# Altium PCB PCB1.PcbDoc
Units mil, origin at the board's own origin, x right, y up, seen from the top; angles counter-clockwise.
Board outline 3930 x 2900 mil, 2 copper layers (Top Layer, Bottom Layer); 19 components, 44 nets, 199 pads, 69 vias.
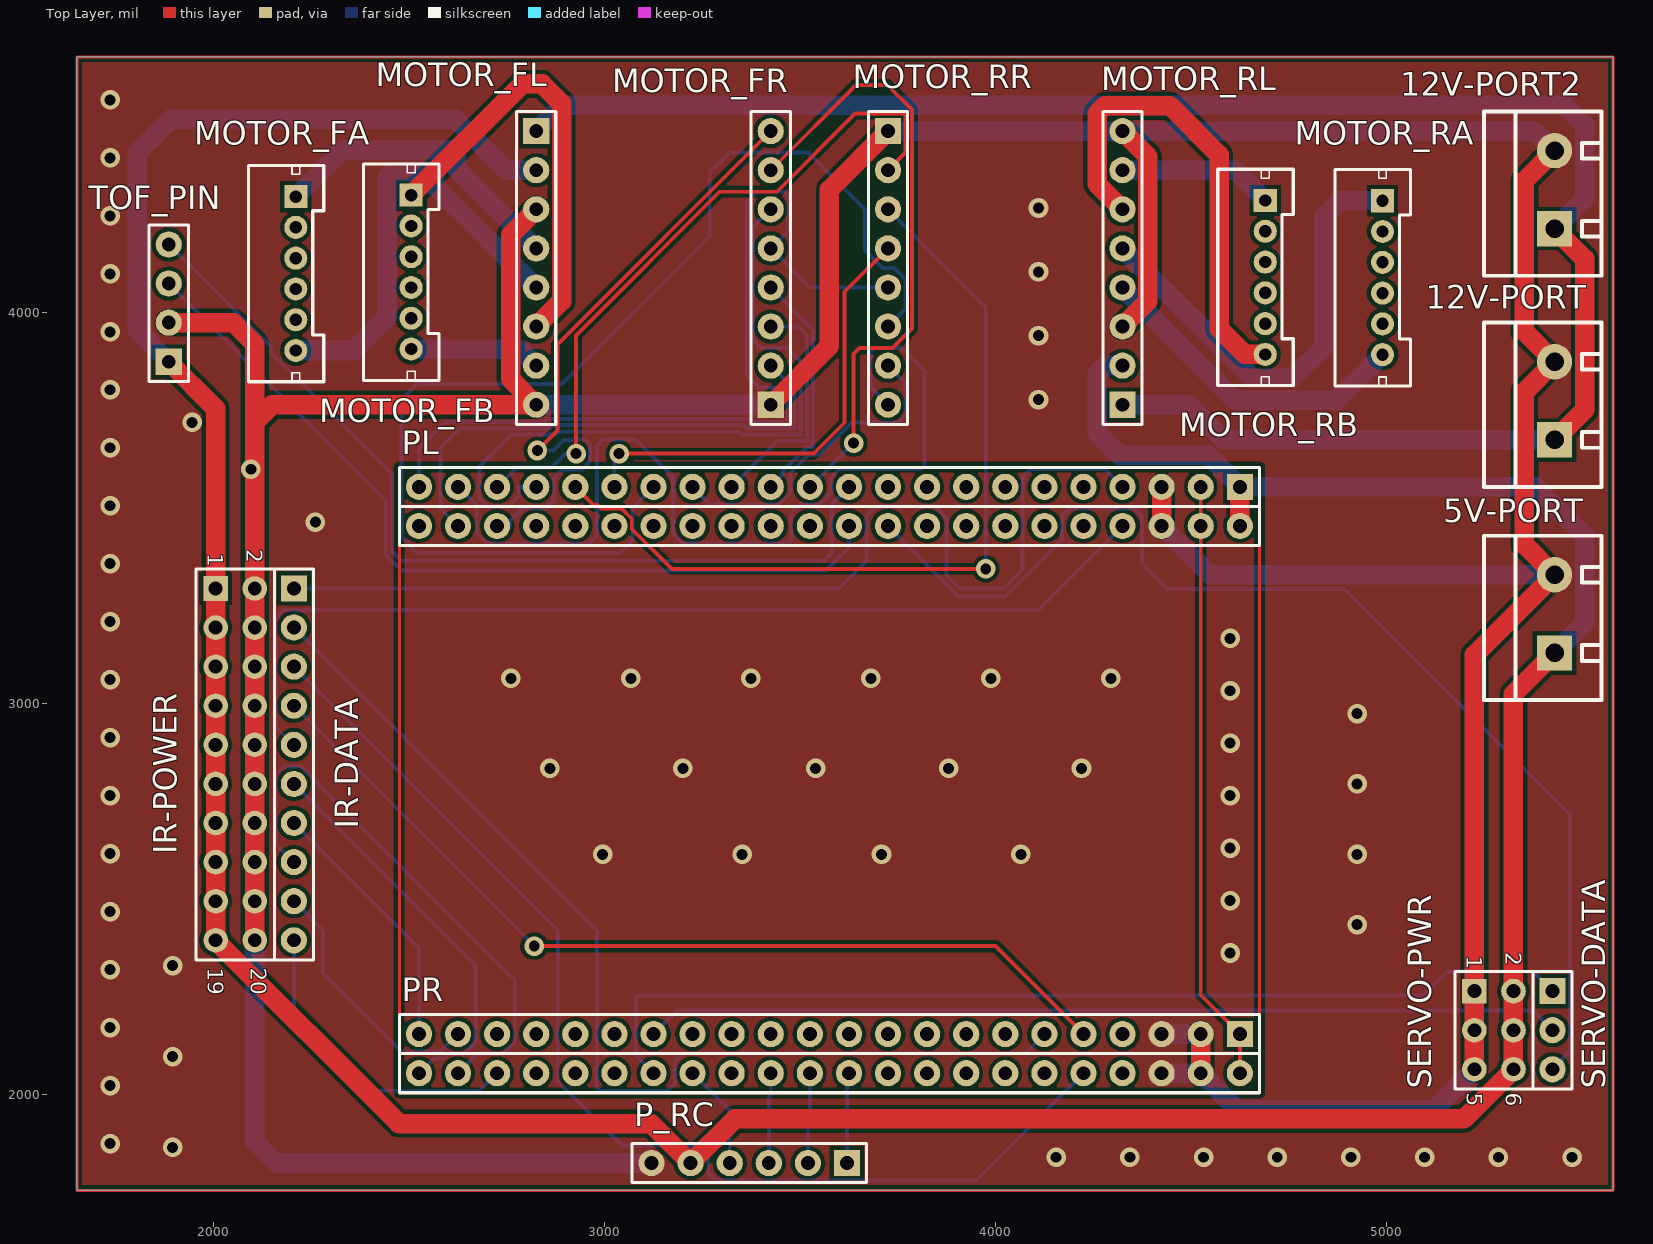
[diagram p0: Top Layer view]
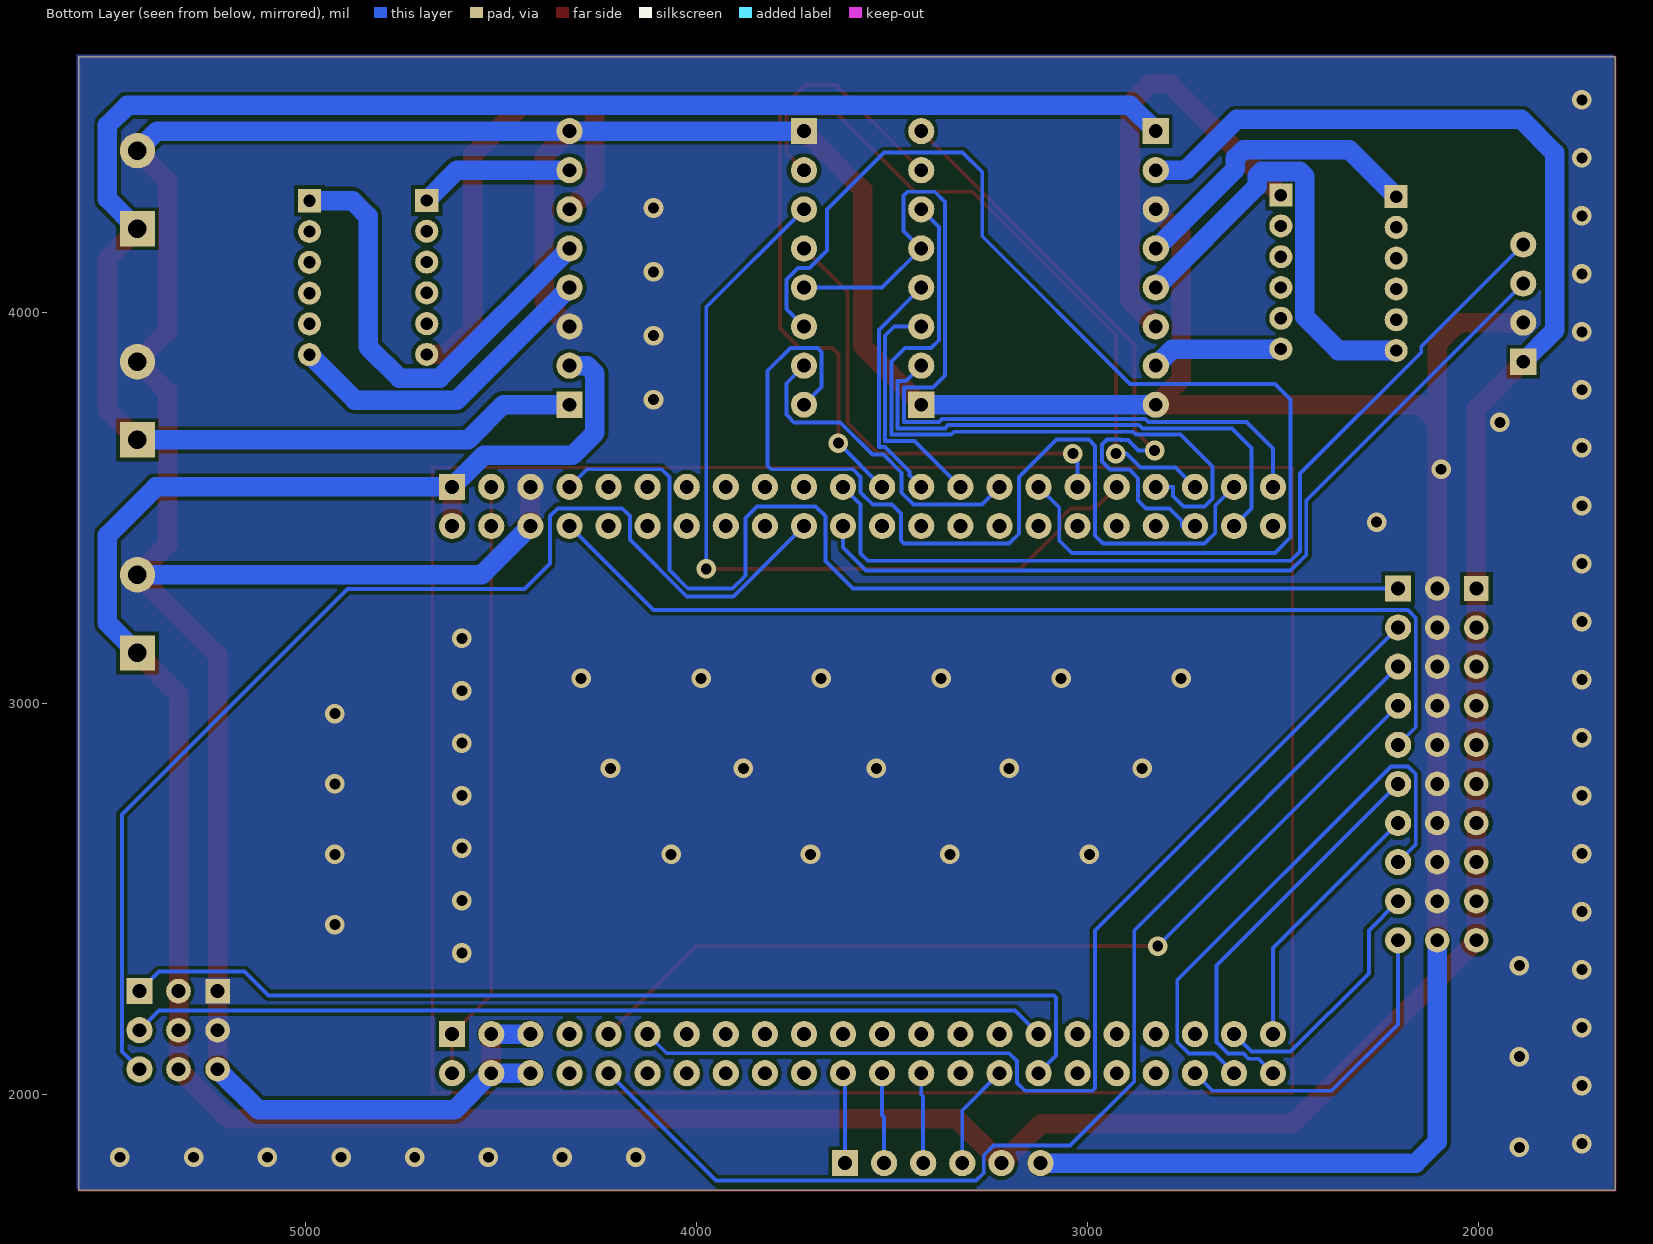
[diagram p1: Bottom Layer view, seen from below]

## Layer stack, top to bottom
Top Solder: solder mask 0.4, Solder Resist, Dk 3.5
Top Layer: signal copper 1.4
Dielectric 1: dielectric 12.6, FR-4, Dk 4.8
Bottom Layer: signal copper 1.4
Bottom Solder: solder mask 0.4, Solder Resist, Dk 3.5

## Board outline
1650,1755 1650,4655 5580,4655 5580,1755

## Design rules (kind name [scope] priority, off if disabled: settings)
Clearance [All] p1: gap=6 ignorepadtopadclearanceinfootprint=FALSE except(10: Arc-Poly Track-Poly SMDPad-Poly THPad-Poly Via-Poly Fill-Poly Poly-Poly)
ComponentClearance [All] p1: gap=0 collisioncheckmode=3 verticalgap=10 showdistances=FALSE
PolygonConnect [All] p1: thpad.connectstyle=Direct thpad.reliefconductorwidth=10 thpad.reliefentries=4 thpad.polygonreliefangle="90 Angle" thpad.airgapwidth=10 smdpad.connectstyle=Relief smdpad.reliefconductorwidth=10 smdpad.reliefentries=4 smdpad.polygonreliefangle="90 Angle" smdpad.airgapwidth=10 via.connectstyle=Direct via.reliefconductorwidth=10 via.reliefentries=4 via.polygonreliefangle="90 Angle" via.airgapwidth=10
RoutingVias [All] p1: holewidth=28 width=50 viastyle="Through Hole" minholewidth=28 minwidth=50 maxholewidth=28 maxwidth=50
SilkToSilkClearance [All] p1: silktosilkclearance=1
SilkToSolderMaskClearance [IsPad] p1: minsilkscreentomaskgap=1 clearancetoexposedcopper=TRUE
SolderMaskExpansion [All] p1: expansion=4
Width Width_1 [(InNet('+5') OR InNet('+12') OR InNet('FAO1') OR InNet('FAO2') OR InNet('FBO1') OR InNet('FBO2') OR InNet('GND') OR InNet('RAO1') OR InNet('RAO2') OR InNet('RBO1') OR InNet('RBO2'))] p1: maxlimit=110 minlimit=40 preferedwidth=50
Width [All] p2: maxlimit=10 minlimit=7 preferedwidth=10
27 further rules are at their usual default settings.

## Components (designator, comment, footprint, x,y, rotation, side; value= is the part's Value field where it differs from the comment)
5V-PORT "HDR-1X2" KF301-5.0-2P 5430,3330 r90 top
12V-PORT "HDR-1X2" KF301-5.0-2P 5430,3875 r90 top
12V-PORT2 "HDR-1X2" KF301-5.0-2P 5430,4415 r90 top
IR-DATA "HDR-1X10" HDR2.54-LI-10P 2205,2845 r270 top
IR-POWER "Header 2X10" HDR2.54-LI-2x10P 2055,2845 r270 top
MOTOR_FA "HDR-1X6" PH2.0-LI-6P 2210,4100.63 r270 top
MOTOR_FB "HDR-1X6" PH2.0-LI-6P 2505,4104.37 r270 top
MOTOR_FL "MHDR1X8" HDR2.54-M-LI-8P 2825,4115 r270 top
MOTOR_FR "MHDR1X8" HDR2.54-M-LI-8P 3425,4115 r90 top
MOTOR_RA "HDR-1X6" PH2.0-LI-6P 4990,4090 r270 top
MOTOR_RB "HDR-1X6" PH2.0-LI-6P 4690,4090.63 r270 top
MOTOR_RL "MHDR1X8" HDR2.54-M-LI-8P 4325,4115 r90 top
MOTOR_RR "MHDR1X8" HDR2.54-M-LI-8P 3725,4115 r270 top
P_RC "MHDR1X6" HDR2.54-M-LI-6P 3370,1825 r180 top
PL "Header 22X2" P_M_2x22P 4625,3455 r180 top
PR "Header 22X2" P_M_2x22P 4625,2055 r180 top
SERVO-DATA "HDR-1X3" HDR2.54-LI-3P 5425,2165 r270 top
SERVO-PWR "Header3X2" HDR2.54-LI-2x3P 5275,2165 r270 top
TOF_PIN "HDR-1X4" HDR2.54-LI-4P 1885,4025 r90 top

## Footprints (in the part's own frame and the unit in brackets; to place one, negate y for a bottom-side part, rotate by r counter-clockwise, add the part's x,y. Pads: shape width x height; smd on the part's side, far side on the other; paste and mask are expansions set on the pad)
HDR2.54-LI-2x3P [mm] "封装库来自淘宝卖家 ID：黄晶宝石"
  rect 1.6x1.6 hole 0.9: 1(-2.54,-1.27)
  round 1.6 hole 0.9: 2(-2.54,1.27) 3(0,-1.27) 4(0,1.27) 5(2.54,-1.27) 6(2.54,1.27)
  silkscreen extent -3.81,-2.54 3.81,2.54, body extent -3.81,-2.54 3.81,2.54, height 8.5
HDR2.54-LI-2x10P [mm] "双排排针，10x2脚 淘宝ID:黄晶宝石   店铺网址:https://shop463601444.taobao.com"
  rect 1.6x1.6 hole 0.9: 1(-11.43,-1.27)
  round 1.6 hole 0.9: 2(-11.43,1.27) 3(-8.89,-1.27) 4(-8.89,1.27) 5(-6.35,-1.27) 6(-6.35,1.27) 7(-3.81,-1.27) 8(-3.81,1.27) 9(-1.27,-1.27) 10(-1.27,1.27) 11(1.27,-1.27) 12(1.27,1.27) 13(3.81,-1.27) 14(3.81,1.27) 15(6.35,-1.27) 16(6.35,1.27) 17(8.89,-1.27) 18(8.89,1.27) 19(11.43,-1.27) 20(11.43,1.27)
  silkscreen extent -12.7,-2.54 12.7,2.54, body extent -12.7,-2.54 12.7,2.54, height 8.5
HDR2.54-LI-3P [mm] "排针，3脚"
  rect 1.7x1.7 hole 0.9: 1(-2.54,0)
  round 1.7 hole 0.9: 2(0,0) 3(2.54,0)
  silkscreen extent -3.81,-1.27 3.81,1.27, body extent -3.81,-1.27 3.81,1.27, height 8.5
HDR2.54-LI-4P [mm] "排针，4脚"
  rect 1.7x1.7 hole 0.9: 1(-3.81,0)
  round 1.7 hole 0.9: 2(-1.27,0) 3(1.27,0) 4(3.81,0)
  silkscreen extent -5.08,-1.27 5.08,1.27, body extent -5.08,-1.27 5.08,1.27, height 8.5
HDR2.54-LI-10P [mm] "排针，10脚   淘宝ID:黄晶宝石   店铺网址:https://shop463601444.taobao.com"
  rect 1.7x1.7 hole 0.9: 1(-11.43,0)
  round 1.7 hole 0.9: 2(-8.89,0) 3(-6.35,0) 4(-3.81,0) 5(-1.27,0) 6(1.27,0) 7(3.81,0) 8(6.35,0) 9(8.89,0) 10(11.43,0)
  silkscreen extent -12.7,-1.27 12.7,1.27, body extent -12.7,-1.27 12.7,1.27, height 8.5
HDR2.54-M-LI-6P [mm] "排母，6脚  淘宝ID:黄晶宝石   店铺网址:https://shop463601444.taobao.com"
  rect 1.7x1.7 hole 0.9: 1(-6.35,0)
  round 1.7 hole 0.9: 2(-3.81,0) 3(-1.27,0) 4(1.27,0) 5(3.81,0) 6(6.35,0)
  silkscreen extent -7.62,-1.27 7.62,1.27, body extent -7.62,-1.27 7.62,1.27, height 8.5
HDR2.54-M-LI-8P [mm] "排母，8脚"
  rect 1.7x1.7 hole 0.9: 1(-8.89,0)
  round 1.7 hole 0.9: 2(-6.35,0) 3(-3.81,0) 4(-1.27,0) 5(1.27,0) 6(3.81,0) 7(6.35,0) 8(8.89,0)
  silkscreen extent -10.16,-1.27 10.16,1.27, body extent -10.16,-1.27 10.16,1.27, height 8.5
KF301-5.0-2P [mm] "可拼接端子/6A"
  rect 2.3x2.3 hole 1.2: 1(-5.08,0)
  round 2.3 hole 1.2: 2(0,0)
  silkscreen extent -8.13,-3.05 2.54,4.57, body extent -7.95,-3 2.55,4.6, height 10.05
P_M_2x22P [mm] "2x22p排母"
  rect 1.7x1.7 hole 0.9: 1(0,-2.54)
  round 1.7 hole 0.9: 2(0,0) 3(2.54,-2.54) 4(2.54,0) 5(5.08,-2.54) 6(5.08,0) 7(7.62,-2.54) 8(7.62,0) 9(10.16,-2.54) 10(10.16,0) 11(12.7,-2.54) 12(12.7,0) 13(15.24,-2.54) 14(15.24,0) 15(17.78,-2.54) 16(17.78,0) 17(20.32,-2.54) 18(20.32,0) 19(22.86,-2.54) 20(22.86,0) 21(25.4,-2.54) 22(25.4,0) 23(27.94,-2.54) 24(27.94,0) 25(30.48,-2.54) 26(30.48,0) 27(33.02,-2.54) 28(33.02,0) 29(35.56,-2.54) 30(35.56,0) 31(38.1,-2.54) 32(38.1,0) 33(40.64,-2.54) 34(40.64,0) 35(43.18,-2.54) 36(43.18,0) 37(45.72,-2.54) 38(45.72,0) 39(48.26,-2.54) 40(48.26,0) 41(50.8,-2.54) 42(50.8,0) 43(53.34,-2.54) 44(53.34,0)
  silkscreen extent -1.27,-3.81 54.61,1.27, body extent -6.35,-3.81 54.61,1.27, height 8.5
PH2.0-LI-6P [mm] "长：13.9mm，宽：4.7mm，高：6mm    淘宝ID:黄晶宝石"
  rect 1.5x1.5 hole 0.8: 1(-5,0)
  round 1.5 hole 0.8: 2(-3,0) 3(-1,0) 4(1,0) 5(3,0) 6(5,0)
  silkscreen extent -7.03,-3.08 7.03,1.82, body extent -6.95,-3 6.95,1.7, height 6.01

## Part data
5V-PORT 12V-PORT 12V-PORT2: library part "Header 2", "2P接插件", BOM名称=2P接插件, 学习资源=https://shop463601444.taobao.com, 版权归属="·â×°¿âÀ´×ÔÌÔ±¦Âô¼Ò ID£º»Æ¾§±¦Ê"
IR-DATA: library part "Header 10", "10P接插件"
IR-POWER: library part "Header 10X2", "10*2P接插件"
MOTOR_FA MOTOR_FB MOTOR_RA MOTOR_RB: library part "Header 6", "6P接插件"
MOTOR_FL MOTOR_FR MOTOR_RL MOTOR_RR: "Header, 8-Pin", LatestRevisionDate=17-Jul-2002, LatestRevisionNote="Re-released for DXP Platform.", Publisher="Altium Limited"
P_RC: "Header, 6-Pin", LatestRevisionDate=17-Jul-2002, LatestRevisionNote="Re-released for DXP Platform.", Publisher="Altium Limited"
PL PR: "Header, 22-Pin, Dual row", LatestRevisionDate=17-Jul-2002, LatestRevisionNote="Re-released for DXP Platform.", Publisher="Altium Limited"
SERVO-DATA: library part "Header 3", "3P接插件", BOM名称=3P接插件, 学习资源=https://shop463601444.taobao.com, 版权归属="封装库来自淘宝 ID：黄晶宝石"
SERVO-PWR: library part "Header 3X2", "3*2P接插件"
TOF_PIN: library part "Header 4", "4P接插件", BOM名称=4P接插件, 学习资源=https://shop463601444.taobao.com, 版权归属="封装库来自淘宝 ID：黄晶宝石"

## Via types
v1: diameter 50, hole 28, Top Layer to Bottom Layer, 69 vias

## Nets (pads, with @x,y where several pads share a name; then routed paths per layer and width w, separated by ;. In a path a pad name is that pad's centre, name@x,y a point inside that pad or via, vN(x,y) a via of type N, cw(c..) or ccw(c..) an arc to the next point about the centre after c; other vN are vias at no path point)
3V3: PL.3 PL.4 PR.1 PR.2 | length 1541.4
  Top Layer w10: PL.3 PL.4 4525,2255 PR.1 PR.2
+5: 5V-PORT.1 IR-POWER.1 IR-POWER.3 IR-POWER.5 IR-POWER.7 IR-POWER.9 IR-POWER.11 IR-POWER.13 IR-POWER.15 IR-POWER.17 IR-POWER.19 MOTOR_FL.2 MOTOR_RL.2 P_RC.5 PL.1 PL.2 SERVO-PWR.2 SERVO-PWR.4 SERVO-PWR.6 TOF_PIN.1 | length 9985
  Top Layer w50: TOF_PIN.1 2005,3755 IR-POWER.1 IR-POWER.3 IR-POWER.5 IR-POWER.7 IR-POWER.9 IR-POWER.11 IR-POWER.13 IR-POWER.15 IR-POWER.17 IR-POWER.19 2474,1926 3119,1926 P_RC.5 3333,1938 5198,1938 SERVO-PWR.6 SERVO-PWR.4 SERVO-PWR.2 5325,3025 5V-PORT.1 ; PL.2 PL.1
  Bottom Layer w50: TOF_PIN.1 1804.53,3955.47 1804.53,4409.53 1890,4495 2618,4495 2748,4365 MOTOR_FL.2 ; MOTOR_RL.2 4280,3865 4260,3845 4260,3693 4317.53,3635.47 4544.53,3635.47 PL.1 5383,3555 5507,3431 5507,3207 5V-PORT.1
+12: 12V-PORT2.1 12V-PORT.1 MOTOR_FL.1 MOTOR_RL.1 | length 4773.4
  Top Layer w50: 12V-PORT.1 5507,3752 5507,4138 12V-PORT2.1
  Bottom Layer w50: MOTOR_FL.1 2891,4531 5456,4531 5507,4480 5507,4292 12V-PORT2.1 ; MOTOR_RL.1 4494.47,3765 4584.47,3675 12V-PORT.1
FAO1: MOTOR_FA.1 MOTOR_FL.4 | length 785.8
  Bottom Layer w50: MOTOR_FA.1 2330.27,4417.75 2600,4417.75 2621.53,4396.22 2621.53,4368.47 MOTOR_FL.4
FAO2: MOTOR_FA.6 MOTOR_FL.5 | length 1153.6
  Bottom Layer w50: MOTOR_FA.6 2358,3903.78 2444.47,3990.25 2444.47,4350 2456.22,4361.75 2554.25,4361.75 2566,4350 2566,4324 MOTOR_FL.5
FBO1: MOTOR_FB.6 MOTOR_FL.7 | length 337.6
  Bottom Layer w50: MOTOR_FB.6 2782.48,3907.52 MOTOR_FL.7
FBO2: MOTOR_FB.1 MOTOR_FL.6 | length 1121.6
  Top Layer w50: MOTOR_FB.1 2789.78,4586 2840,4586 2890,4536 2890,4030 MOTOR_FL.6
GND: 5V-PORT.2 12V-PORT2.2 12V-PORT.2 IR-POWER.2 IR-POWER.4 IR-POWER.6 IR-POWER.8 IR-POWER.10 IR-POWER.12 IR-POWER.14 IR-POWER.16 IR-POWER.18 IR-POWER.20 MOTOR_FL.3 MOTOR_FL.8 MOTOR_FR.1 MOTOR_RL.3 MOTOR_RL.8 MOTOR_RR.1 P_RC.6 PL.5 PL.6 PR.3 PR.4 PR.5 PR.6 SERVO-PWR.1 SERVO-PWR.3 SERVO-PWR.5 TOF_PIN.2 | length 13118.2
  Top Layer w50: TOF_PIN.2 2050,3975 2105,3920 2105,3720 ; IR-POWER.20 IR-POWER.18 IR-POWER.16 IR-POWER.14 IR-POWER.12 IR-POWER.10 IR-POWER.8 IR-POWER.6 IR-POWER.4 IR-POWER.2 2105,3720 ; MOTOR_FL.3 2760,4200 2760,3830 MOTOR_FL.8 2150,3765 2105,3720 ; MOTOR_FR.1 3575,3915 3575,4315 MOTOR_RR.1 ; MOTOR_RL.3 4390,4030 4390,4400 MOTOR_RL.8 ; PL.6 PL.5 ; PR.4 PR.3 ; SERVO-PWR.5 SERVO-PWR.3 SERVO-PWR.1 5225,3125 5V-PORT.2 5353,3407 5353,3798 12V-PORT.2 5353,3952 5353,4338 12V-PORT2.2
  Bottom Layer w50: IR-POWER.20 2105,1880 2160,1825 P_RC.6 ; MOTOR_FL.8 MOTOR_FR.1 ; MOTOR_RR.1 MOTOR_RL.8 5380,4465 12V-PORT2.2 ; PR.6 PR.4 4619,1961 5121,1961 SERVO-PWR.5 ; PR.5 PR.3 ; PL.6 4550,3330 5V-PORT.2
  other v1: 4155,1840 4343.57,1840 4532.14,1840 4720.71,1840 4909.29,1840 5097.86,1840 5286.43,1840 5475,1840 1895,1865 1735,1875 1735,2023.33 1895,2097.5 1735,2171.67 1735,2320 1895,2330 4600,2362.5 4925,2435 1735,2468.33 4600,2496.67 2995,2615 3351.67,2615 3708.33,2615 4065,2615 4925,2615 1735,2616.67 4600,2630.83 1735,2765 4600,2765 4925,2795 2860,2835 3200,2835 3540,2835 3880,2835 4220,2835 4600,2899.17 1735,2913.33 4925,2975 4600,3033.33 1735,3061.67 2760,3065 3067,3065 3374,3065 3681,3065 3988,3065 4295,3065 4600,3167.5 1735,3210 1735,3358.33 2260,3465 1735,3506.67 2095,3600 1735,3655 1945,3720 4110,3778.33 1735,3803.33 4110,3941.67 1735,3951.67 1735,4100 4110,4105 1735,4248.33 4110,4268.33 1735,4396.67 1735,4545
PA2: PR.32 SERVO-DATA.1 | length 2605.7
  Bottom Layer w10: PR.32 3080,2100 3080,2249 3085,2254 5095,2254 5156,2315 5375,2315 SERVO-DATA.1
PA3: PR.31 SERVO-DATA.2 | length 2345.9
  Bottom Layer w10: PR.31 3185.47,2215.47 5374.53,2215.47 SERVO-DATA.2
PA4: P_RC.4 PR.30 | length 269.4
  Bottom Layer w10: PR.30 3320,1960 P_RC.4
PA9: PL.22 TOF_PIN.3 | length 2204.9
  Bottom Layer w10: TOF_PIN.3 2440,3520 2440,3381 2480,3341 3566,3341 3625,3400 PL.22
PA10: PL.21 TOF_PIN.4 | length 2352
  Bottom Layer w10: TOF_PIN.4 2146,3914 2146,3899 2456,3589 2456,3390 2480,3366 3561,3366 3580,3385 3580,3510 PL.21
PA12: MOTOR_FR.7 PL.23 | length 1599.7
  Top Layer w10: MOTOR_FR.7 3643,4583 3723,4583 3786,4520 3786,3960 3736,3910 3652,3910 3637,3895 v1(3637,3667)
  Bottom Layer w10: PL.23 v1(3637,3667)
PB0: P_RC.2 PR.24 | length 232.1
  Bottom Layer w10: P_RC.2 3520,1943 3525,1948 PR.24
PB5: MOTOR_FR.6 PL.37 | length 1815.9
  Bottom Layer w10: PL.37 2780.53,3555 2780.53,3531.47 2754.07,3505 2700,3505 2680,3525 2680,3607 2761.53,3688.53 2875.42,3688.53 2882.88,3696 3341.07,3696 3348.53,3688.53 3501.47,3688.53 3501.47,3875.53 3467,3910 3400,3910 3380,3930 3380,4220 MOTOR_FR.6
PB6: MOTOR_FR.8 PL.40 | length 1606.6
  Top Layer w10: v1(2828,3648) 2879,3699 2879,3919 MOTOR_FR.8
  Bottom Layer w10: PL.40 2758,3455 2758,3468 2790,3500 2850,3500 2870,3520 2870,3577 2892.47,3599.47 2942.47,3599.47 2963,3620 2963,3663 2950,3676 2914.88,3676 2913.85,3674.96 2896.28,3674.96 2869.31,3648 v1(2828,3648)
PB7: MOTOR_RR.2 PL.39 | length 1781.5
  Top Layer w10: v1(2927,3640) 2927,3942.59 3294.41,4310 3441,4310 3641,4510 3770,4510 3770,4410 MOTOR_RR.2
  Bottom Layer w10: PL.39 2774.37,3604.37 2864.53,3604.37 2900.16,3640 v1(2927,3640)
PB8: MOTOR_FR.2 PL.42 | length 1348.8
  Bottom Layer w10: PL.42 2580,3500 2580,3654.03 2630.5,3704.53 2859.42,3704.53 2867.88,3713 3356.07,3713 3364.53,3704.53 3485.47,3704.53 3485.47,3825.47 3464.53,3825.47 MOTOR_FR.2
PB9: MOTOR_RR.8 PL.41 | length 2442.5
  Bottom Layer w10: PL.41 2673,3507 2673,3437 2700,3410 2960,3410 2980,3430 2980,3659.86 2996.14,3676 3079,3676 3175,3580 3175,3435 3200,3410 3469,3410 3477,3418 3477,3487 3500,3510 3549,3510 3580,3541 3580,3580 3600,3600 3809,3600 3818,3609 3818,3852 3760,3910 3690,3910 3680,3900 3680,3810 MOTOR_RR.8
PB12: IR-DATA.2 PR.11 | length 2739.8
  Bottom Layer w10: IR-DATA.2 2980,2420 2980,2017 2987,2010 3160,2010 3180,2030 3180,2086 3200,2106 4076,2106 PR.11
PB13: IR-DATA.3 PR.10 | length 2931.1
  Bottom Layer w10: IR-DATA.3 2880,2420 2880,2034 3044,1870 3240,1870 3265,1845 3265,1800 3285,1780 3950,1780 PR.10
PB14: IR-DATA.4 PR.9 | length 2367.9
  Top Layer w10: v1(2820,2380) 4000,2380 PR.9
  Bottom Layer w10: IR-DATA.4 v1(2820,2380)
PB15: IR-DATA.5 PL.8 | length 2606
  Bottom Layer w10: IR-DATA.5 2160,2940 2160,3220 2180,3240 4110,3240 PL.8
PC4: P_RC.3 PR.26 | length 232.1
  Bottom Layer w10: P_RC.3 3420,1995 3425,2000 PR.26
PC9: PL.20 SERVO-DATA.3 | length 3013.8
  Bottom Layer w10: PL.20 3905,3275 4025,3275 4170,3420 4170,3480 4190,3500 4355,3500 4375,3480 4375,3359 4440,3294 4893,3294 5470,2717 5470,2110 SERVO-DATA.3
PC10: MOTOR_FR.4 PL.25 | length 609.2
  Bottom Layer w10: PL.25 3455.41,3585.41 3455.41,3594.41 3517.53,3656.53 3533.47,3656.53 3533.47,3956.53 MOTOR_FR.4
PC12: MOTOR_FR.3 PL.27 | length 612.3
  Bottom Layer w10: PL.27 3442.53,3672.53 3517.47,3672.53 3517.47,3941.53 3494,3965 MOTOR_FR.3
PD1: MOTOR_RR.7 PL.29 | length 832.4
  Bottom Layer w10: PL.29 3270,3510 3445,3510 3475,3540 3475,3591 3521.23,3637.23 3549.47,3637.23 3632.23,3720 3750,3720 3770,3740 3770,3820 MOTOR_RR.7
PD3: MOTOR_RR.6 PL.31 | length 3114.8
  Bottom Layer w10: PL.31 3072,3502 3072,3418 3040,3386 2520,3386 2480,3426 2480,3778 2520,3818 2891,3818 3269,4196 3269,4360 3319,4410 3520,4410 3666,4264 3666,4160 3711,4115 3740,4115 3770,4085 3770,4010 MOTOR_RR.6
PD5: MOTOR_RR.4 PL.33 | length 1191.7
  Top Layer w10: v1(3037,3640) 3535,3640 3614,3719 3614,4054 MOTOR_RR.4
  Bottom Layer w10: PL.33 3025,3628 v1(3037,3640)
PD7: MOTOR_RR.3 PL.35 | length 2179.8
  Top Layer w10: PL.35 2975,3505 2980,3510 2990.54,3499.46 3043.42,3499.46 3069.46,3473.42 3069.46,3447.65 3172.12,3345 v1(3975,3345)
  Bottom Layer w10: MOTOR_RR.3 3975,4015 v1(3975,3345)
PD8: IR-DATA.1 PL.7 | length 2732
  Bottom Layer w10: IR-DATA.1 3600,3295 3670,3365 3670,3480 3695,3505 3845,3505 3875,3475 3875,3327.63 3907.63,3295 4022.37,3295 4069.47,3342.09 4069.47,3580 4089.47,3600 4280,3600 PL.7
PE1: MOTOR_FR.5 MOTOR_RR.5 PL.43 | length 2344.2
  Bottom Layer w10: PL.43 2525,3653 2592.53,3720.53 2843.42,3720.53 2851.88,3729 3371.53,3729 3380,3720.53 3469.47,3720.53 3469.47,3809.47 3394.53,3809.47 3364,3840 3364,4283.47 3390.53,4310 3460,4310 3470,4300 3470,4210 MOTOR_FR.5 3525,4065 MOTOR_RR.5
PE2: IR-DATA.6 PR.44 | length 1030.7
  Bottom Layer w10: IR-DATA.6 2670,2330 2670,2135 2640,2105 2601,2105 2588,2092 2562,2092 PR.44
PE3: IR-DATA.7 PR.43 | length 672.5
  Bottom Layer w10: IR-DATA.7 2525,2375 PR.43
PE4: IR-DATA.8 PR.42 | length 1424.6
  Bottom Layer w10: IR-DATA.8 2160,2640 2160,2820 2180,2840 2223,2840 2770,2293 2770,2135 2740,2105 2675,2105 PR.42
PE5: IR-DATA.9 PR.41 | length 662.5
  Bottom Layer w10: IR-DATA.9 2280,2420 2280,2310 2480,2110 2580,2110 PR.41
PE6: IR-DATA.10 PR.40 | length 824.1
  Bottom Layer w10: IR-DATA.10 2205,2180 2375,2010 2680,2010 PR.40
PE7: P_RC.1 PR.22 | length 232.1
  Bottom Layer w10: P_RC.1 3620,2050 PR.22
RAO1: MOTOR_RA.6 MOTOR_RL.4 | length 832.4
  Bottom Layer w50: MOTOR_RL.4 4613,3777 4873.85,3777 MOTOR_RA.6
RAO2: MOTOR_RA.1 MOTOR_RL.5 | length 1186.1
  Bottom Layer w50: MOTOR_RL.5 4657,3833 4760,3833 4840,3913 4840,4246.85 4880,4286.85 MOTOR_RA.1
RBO1: MOTOR_RB.1 MOTOR_RL.7 | length 397.1
  Bottom Layer w50: MOTOR_RL.7 4612.48,4365 MOTOR_RB.1
RBO2: MOTOR_RB.6 MOTOR_RL.6 | length 1233.8
  Top Layer w50: MOTOR_RL.6 4260,4330 4260,4510 4280,4530 4446,4530 4572,4404 4572,3960 4638.22,3893.78 MOTOR_RB.6
pads on no net: MOTOR_FA.2 MOTOR_FA.3 MOTOR_FA.4 MOTOR_FA.5 MOTOR_FB.2 MOTOR_FB.3 MOTOR_FB.4 MOTOR_FB.5 MOTOR_RA.2 MOTOR_RA.3 MOTOR_RA.4 MOTOR_RA.5 MOTOR_RB.2 MOTOR_RB.3 MOTOR_RB.4 MOTOR_RB.5 PL.9 PL.10 PL.11 PL.12 PL.13 PL.14 PL.15 PL.16 PL.17 PL.18 PL.19 PL.24 PL.26 PL.28 PL.30 PL.32 PL.34 PL.36 PL.38 PL.44 PR.7 PR.8 PR.12 PR.13 PR.14 PR.15 PR.16 PR.17 PR.18 PR.19 PR.20 PR.21 PR.23 PR.25 PR.27 PR.28 PR.29 PR.33 PR.34 PR.35 PR.36 PR.37 PR.38 PR.39
copper on no net: | length 21260
  Top Layer w7.87: 1650,1755 5580,1755 5580,4655 1650,4655 1650,1755 ; 2475,2005 2475,3605 4675,3605 4675,2005 2475,2005

## Polygon pours and split planes (outlines as drawn)
GND on Top Layer (solid, remove dead copper, pour order 11): 1650,4655 5580,4655 5580,1755 1650,1755
GND on Bottom Layer (solid, remove dead copper, pour order 13): 1655,4660 5585,4660 5585,1760 1655,1760

## Text inside footprints (layer, text, board x,y; h text height)
IR-POWER: Top Overlay "2" at 2085,3395 h40 r270; Top Overlay "1" at 1985,3385 h40 r270; Top Overlay "20" at 2095,2325 h40 r270; Top Overlay "19" at 1985,2325 h40 r270
SERVO-PWR: Top Overlay "1" at 5205,2355 h40 r270; Top Overlay "2" at 5305,2365 h40 r270; Top Overlay "5" at 5205,2005 h40 r270; Top Overlay "6" at 5305,2005 h40 r270